# Altium PCB EE52_Digital_Oscilloscope.PcbDoc (part 2 of 5)
Units mil, origin at the board's own origin, x right, y up, seen from the top; angles counter-clockwise.
Board outline 7431 x 5662 mil, 2 copper layers (Top Layer, Bottom Layer); 305 components, 396 nets, 1532 pads, 389 vias.
Unrouted connection lines stored in the file: 2.
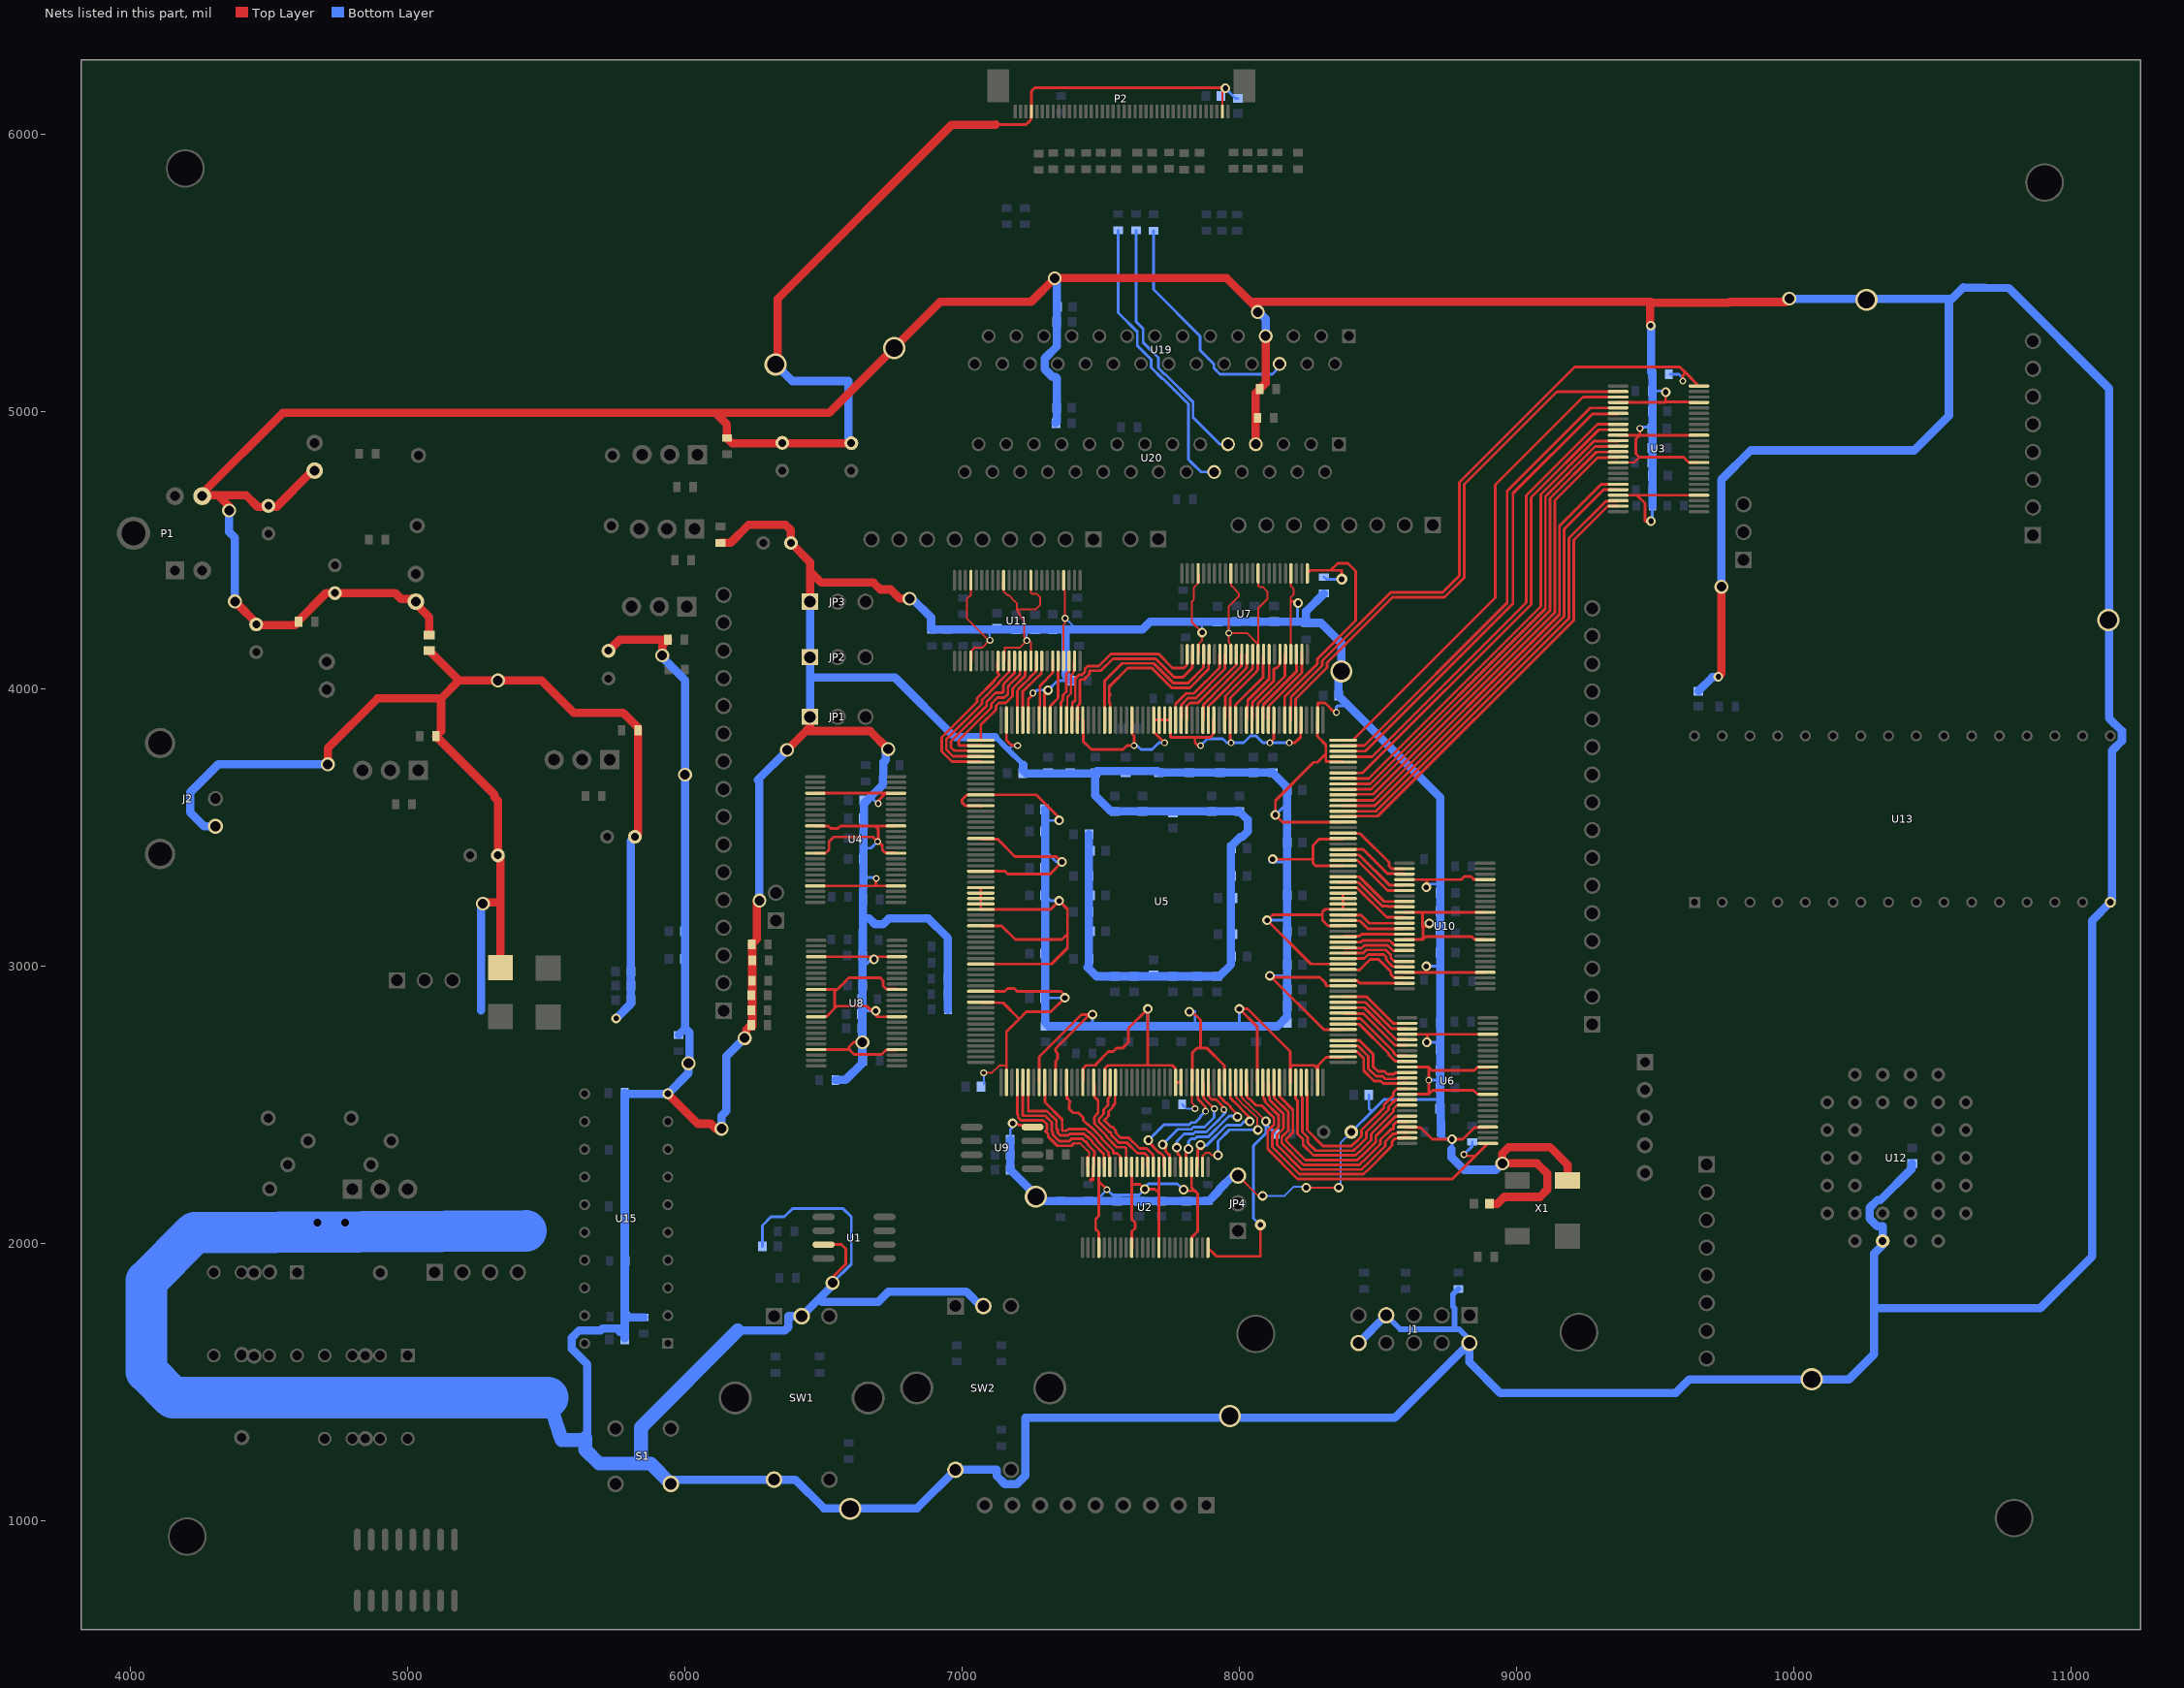
[diagram p2: the nets of this part, all layers, seen from the top]

## Via types
v1: diameter 35, hole 20, Top Layer to Bottom Layer, 188 vias
v2: diameter 25, hole 15, Top Layer to Bottom Layer, 82 vias
v3: diameter 60, hole 42, Top Layer to Bottom Layer, 48 vias
v4: diameter 50, hole 35, Top Layer to Bottom Layer, 46 vias
v5: diameter 80, hole 62, Top Layer to Bottom Layer, 14 vias
v6: diameter 40, hole 20, Top Layer to Bottom Layer, 10 vias
v7: diameter 45, hole 30, Top Layer to Bottom Layer, 1 vias

## Nets (pads, with @x,y where several pads share a name; then routed paths per layer and width w, separated by ;. In a path a pad name is that pad's centre, name@x,y a point inside that pad or via, vN(x,y) a via of type N, cw(c..) or ccw(c..) an arc to the next point about the centre after c; other vN are vias at no path point) (continued)
GND: C1.1 C2.1 C3.1 C4.1 C5.1 C6.1 C7.1 C8.1 C9.1 C10.1 C11.1 C12.1 C13.1 C14.1 C15.1 C16.1 C17.1 C18.1 C19.1 C20.1 C21.1 C22.1 C23.1 C24.1 C25.1 C26.1 C27.1 C28.1 C29.1 C30.1 C31.1 C32.1 C33.1 C34.1 C35.1 C36.1 C37.1 C38.1 C39.1 C40.1 C41.1 C42.1 C43.1 C44.1 C45.1 C46.1 C47.1 C48.1 C49.1 C50.1 C51.2 C52.1 C53.1 C54.1 C55.1 C56.1 C57.1 C58.1 C59.1 C60.1 C61.1 C62.1 C63.1 C64.1 C65.1 C66.1 C67.1 C68.1 C69.1 C70.1 C71.1 C72.1 C73.1 C74.2 C75.1 C76.1 C77.1 C78.1 C79.1 C80.1 C81.1 C82.1 C83.1 C84.1 C85.1 C86.1 C87.1 C88.1 C89.1 C90.1 C91.1 C92.1 C93.1 C96.1 C99.1 C101.2 C103.2 C104.2 C105.1 C106.1 C107.1 C108.1 C109.1 C110.1 C112.2@4497,4660 C113.2 C115.1 C118.1 C123.1 C124.1 C125.1 C126.1 C127.1 C128.1 D1.2 D3.2 J1.2 J1.7 J1.10 JP1.1 JP2.1 JP3.1 JP4.3 L1.2 P1.4 P2.1 P2.36 R7.2 R8.1 R10.1 R11.1 R14.2 R16.1 R17.1 R18.1 R19.1 R20.1 R21.1 R25.1 R27.1 R29.2 R31.1 R32.1 R33.1 R34.1 R35.1 R36.1 R37.1 R42.1 R43.1 R44.1 R56.1 R64.1 R67.1 R68.1 R97.1 R102.1 R109.1 R110.1 R111.2 R112.2 R113.2 R114.2 R117.2 R118.1 R119.2 R120.1 R121.2 R122.1 R123.2 R124.1 R125.2 R126.1 R127.2 R128.1 R129.2 R130.1 R131.1 R132.1 R133.1 S1.1 SW1.2 SW1.5 SW2.2 SW2.5 U1.3 U2.4 U2.10 U2.15 U2.21 U2.28 U2.34 U2.39 U2.45 U3.4 U3.10 U3.15 U3.21 U3.28 U3.34 U3.39 U3.45 U4.4 U4.10 U4.15 U4.21 U4.28 U4.34 U4.39 U4.45 U5.2 U5.8 U5.11 U5.16 U5.20 U5.33 U5.34 U5.36 U5.42 U5.48 U5.54 U5.59 U5.62 U5.67 U5.75 U5.79 U5.86 U5.89 U5.90 U5.91 U5.92 U5.97 U5.102 U5.105 U5.116 U5.122 U5.125 U5.130 U5.138 U5.141 U5.149 U5.150 U5.151 U5.152 U5.156 U5.165 U5.172 U5.175 U5.179 U5.191 U5.193 U5.199 U5.205 U5.208 U5.209 U5.210 U5.211 U5.212 U5.215 U5.222 U5.227 U5.229 U6.4 U6.10 U6.15 U6.21 U6.28 U6.34 U6.39 U6.45 U7.4 U7.10 U7.15 U7.21 U7.28 U7.34 U7.39 U7.45 U8.4 U8.10 U8.15 U8.21 U8.28 U8.34 U8.39 U8.45 U9.4 U10.4 U10.10 U10.15 U10.21 U10.28 U10.34 U10.39 U10.45 U11.4 U11.10 U11.15 U11.21 U11.28 U11.34 U11.39 U11.45 U12.16 U13.16 U15.10 U19.7 U20.7 X1.2 | length 82113.4
  Top Layer w7: U11.28@7031.3,4100.22 7034.58,4103.5 7034.58,4138.51 7044.19,4148.12 7071.96,4148.12 7097.42,4173.58 7018,4253 7018,4325.6 7031.3,4338.9 U11.21@7031.3,4391.56 ; v2(7077.56,2615) 7107.7,2615 7133.2,2640.5 7155.19,2640.5 7159.69,2645 ; U11.34@7149.41,4100.22 7152.69,4100.22 7152.69,4148.12 7207.12,4148.12 v2(7233,4174) ; U11.15@7149.41,4391.56 7146.13,4391.56 7146.13,4359.94 7149.41,4356.66 7149.41,4350.59 7154.01,4346.2 7163.21,4337.43 7168.3,4337.43 7190.07,4315.66 7197.79,4307.95 7197.79,4285.92 ; U11.39@7247.84,4100.22 7247.84,4168.16 7236,4180 v2@7234.5,4178.5 ; U11.10@7247.84,4391.56 7247.84,4346.76 7253.1,4341.5 7269.56,4341.5 7282,4329.06 7282,4302.94 7264.98,4285.92 7197.79,4285.92 ; U11.45@7365.95,4100.22 7365.95,4230 ; 7365.95,4231 7370.5,4235.55 7370.5,4351.99 7369.22,4353.27 7369.22,4388.28 U11.4@7365.95,4391.56 ; U5.36@7828.98,2580 7828.98,2506.02 v2@7840,2495 ; U7.28@7851.3,4124.66 7854.58,4127.94 7854.58,4162.95 7864.19,4172.56 7866,4172.56 v1(7866,4203) 7828.5,4240.5 7828.5,4314.56 7834.69,4320.75 7834.69,4363.69 7854.58,4383.58 7854.58,4412.72 U7.21@7851.3,4416 ; P2.1@7938.68,6081.5 v1@7938.68,6162.68 ; U7.34@7969.41,4124.66 7966.13,4127.94 7966.13,4162.95 7962,4167.08 v2(7962,4201) ; U7.15@7969.41,4416 7969.41,4372.69 7974.1,4368 7975.53,4368 7989,4354.53 7989,4353.6 7998,4344.6 7998,4333.4 7962,4297.4 v2(7962,4201) ; JP4.3@7995,2244 v1@8071,2168 ; U7.39@8065.31,4127.19 8064.56,4127.94 8064.56,4162.95 8026.51,4201 v2(7962,4201) ; U7.39@8066.06,4126.44 U7.39@8067.84,4124.66 8067.84,4289.84 8101,4323 8101,4330.08 8100.61,4330.47 8100.61,4349.53 8101,4349.92 8101,4350.6 8084.6,4367 8072.6,4367 8067.84,4371.76 U7.10@8067.84,4416 ; U7.45@8185.95,4124.66 8185.95,4330.42 8195,4339.47 8195,4360.53 8185.95,4369.58 U7.4@8185.95,4416 ; v1(8241,2200) 8353,2200 8354,2201 v1(8358,2201) ; U3.39@9366.66,4816.17 9423.66,4816.17 9442.5,4835 ; 7197.79,4285.92 7223,4242 7223,4190 v2@7234.5,4178.5 ; v2(7233,4174) 7236,4177 v2@7234.5,4178.5 ; v2(7233,4174) 7233,4177 v2@7234.5,4178.5
  Top Layer w10: U4.21@6470,3288.74 6689,3288.74 ; U4.15@6470,3406.85 6507.13,3406.85 6519.5,3419.22 6519.5,3448.22 6536.78,3465.5 6678.5,3465.5 v2(6695,3449) ; U4.10@6470,3505.28 6517,3505.28 6526.78,3495.5 6551.22,3495.5 6561,3505.28 6685,3505.28 ; U4.4@6470,3623.39 6734.77,3623.39 6732.99,3621.61 6722.43,3621.61 6697.39,3596.57 v2(6697.39,3586) ; U8.21@6473,2698.74 6592,2698.74 ; U8.15@6473,2816.85 6510.13,2816.85 6540,2846.72 ; U8.10@6473,2915.28 6542,2915.28 ; U8.4@6473,3033.39 6677,3033.39 6677,3023 6681,3019 6682,3020 v1(6682,3024) ; U1.3@6501,1996 6564,1996 6580,1980 6580,1925 6532,1877 v4(6532,1857) ; v4(6640,2725) 6608,2725 6592,2709 6592,2698.74 ; v1@6682,3033.39 U8.45@6764.34,3033.39 ; v1(6688,2838) 6694,2832 6694,2816.85 ; v2(6690,3316) 6689,3315 6689,3288.74 ; v2@6696,3450 v2@6697,3449 ; U4.28@6761.34,3288.74 6689,3288.74 ; U4.34@6761.34,3406.85 6759.56,3408.63 6722.43,3408.63 6711.94,3419.12 6711.94,3434.06 v2@6697,3449 ; U4.39@6761.34,3505.28 6685,3505.28 ; U8.28@6764.34,2698.74 6762.56,2696.96 6725.43,2696.96 6709.2,2680.74 6610,2680.74 6592,2698.74 ; U8.34@6764.34,2816.85 6694,2816.85 ; U8.39@6764.34,2915.28 6762.56,2917.05 6725.43,2917.05 6714.94,2927.54 6714.94,2947.23 6704.84,2957.33 6591.05,2957.33 6574.5,2940.78 6574.5,2940.25 6560.15,2925.9 6559.62,2925.9 6540,2906.28 6540,2846.72 ; U5.229@7067.17,2869.37 7068.94,2867.59 7147.41,2867.59 7205.63,2809.37 ; U5.227@7067.17,2908.74 7153.91,2908.74 7163.72,2918.56 7188.16,2918.56 7197.98,2908.74 7356.26,2908.74 7370,2895 v1(7370,2885) 7320,2835 7231.27,2835 7205.63,2809.37 ; U5.222@7067.17,3007.17 7322.17,3007.17 7380,3065 7380,3115 ; U5.215@7067.17,3144.96 7142.01,3144.96 7191.97,3095 7360,3095 7380,3115 ; U5.208@7067.17,3282.76 U5.209@7067.17,3263.07 U5.210@7067.17,3243.39 U5.211@7067.17,3223.7 U5.212@7067.17,3204.02 7319.02,3204.02 v1(7350,3235) 7380,3205 7380,3115 ; U5.205@7067.17,3341.81 7154.46,3341.81 7164.28,3332 7317,3332 v1(7360,3375) 7340,3395 7190.71,3395 7127.57,3458.14 7068.95,3458.14 U5.199@7067.17,3459.92 ; U5.193@7068.95,3576.25 U5.193@7067.17,3578.03 7011.33,3578.03 7000,3589.36 7000,3599.97 7017.44,3617.4 U5.191@7067.17,3617.4 7267.6,3617.4 7350,3535 v1(7350,3525) ; 7121,6035 7230.12,6035 7240.01,6044.89 7240.9,6044.89 7247.93,6051.92 7247.93,6068.25 7249.71,6070.02 P2.36@7249.71,6081.5 7249.71,6154.71 7262.5,6167.5 7948.5,6167.5 v1(7950,6166) ; U5.2@7159.69,2580 7159.69,2645 7159.69,2763.42 7205.63,2809.37 ; U5.179@7159.69,3887.09 7159.69,3814.31 7179,3795 v2(7200,3795) ; v1(7182,2432) 7198.66,2432 7204.66,2426 7215.96,2426 7217.3,2424.66 7240.06,2424.66 U9.4@7245.72,2419 ; 7191.27,2795 7205.63,2809.37 ; U5.175@7238.43,3887.09 7238.43,3963.43 v2@7260,3985 ; U5.8@7277.8,2580 7277.8,2672.8 7430,2825 v1@7460,2825 ; U5.172@7299.26,3885.31 U5.172@7297.48,3887.09 7297.48,3932.94 7297.5,3982.5 v1(7310,3995) ; U5.11@7336.85,2580 7336.85,2657.2 7344.5,2664.85 7344.5,2685.15 7336.85,2692.8 7336.85,2701.85 v1@7460,2825 ; U5.165@7434,3879.67 7435.28,3880.95 U5.165@7435.28,3887.09 7437.06,3885.31 7437.06,3809.72 7466.28,3780.5 7580.15,3780.5 7594.65,3795 v2(7620,3795) 7620,3829.8 7614.22,3835.57 7614.22,3885.31 U5.156@7612.44,3887.09 ; U5.16@7435.28,2580 7437.06,2581.78 7437.06,2631.51 7447.55,2642 7481.8,2642 7481.8,2645.59 7528.2,2692 7545.28,2692 7557.78,2704.5 7579.5,2704.5 7600,2725 7600,2775 v1(7670,2845) 7670,2642 ; v1(7470,2825) v1@7460,2825 ; U2.4@7493.06,1984 7493.06,2039.22 7481.5,2050.78 7481.5,2086.78 7493.06,2098.33 7493.06,2222.94 ; U2.45@7493.06,2275.34 7493.06,2222.94 ; U5.20@7514.02,2580 7514.92,2580 7514.92,2618.34 7515.8,2619.21 7515.8,2631.51 7526.29,2642 7670,2642 ; v2(7522,2193) 7522,2194 7493.06,2222.94 ; U2.10@7611.17,1984 7612.94,1985.78 7612.94,2022.91 7612.17,2023.69 7612.17,2042.52 7623.5,2053.85 7623.5,2074.15 7612.17,2085.48 7612.17,2213 7641,2213 v1(7659,2195) 7695.59,2195 7709.59,2181 ; 7611.17,2212 U2.39@7611.17,2275.34 ; U2.15@7709.59,1984 7709.59,2181 ; U2.34@7709.59,2275.34 7709.59,2181 ; v2(7730,3805) 7691.18,3843.82 U5.152@7691.18,3887.09 U5.151@7710.87,3887.09 U5.150@7730.55,3887.09 U5.149@7750.24,3887.09 7752.02,3887.09 7752.02,3825.79 7752.72,3825.09 7840,3825.09 ; U5.34@7789.61,2580 U5.33@7769.92,2580 7768.14,2580 7768.14,2631.51 7757.65,2642 7670,2642 ; v1(7799,2193) 7799,2192 7802,2189 7839,2189 ; v1(7820,2835) 7830,2835 7860,2805 7860,2704.5 ; U2.21@7827.7,1984 7827.7,2021.13 7849,2042.43 7849,2179.77 7839.77,2189 7839,2189 ; U2.28@7827.7,2275.34 7827.7,2200.3 7839,2189 ; U5.36@7828.98,2580 7830.5,2580 7830.5,2687.22 7847.78,2704.5 7860,2704.5 ; 7840,2188 7839,2189 ; v2(7860,3795) 7850,3795 7840,3805 7840,3825.09 ; U5.141@7905.94,3887.09 7905.94,3835.57 7895.45,3825.09 7840,3825.09 ; U5.42@7947.09,2580 7945.31,2580 7945.31,2641.3 7882.1,2704.5 7860,2704.5 ; v2(7970,3805) 7966.77,3808.23 U5.138@7966.77,3887.09 7966.77,3966.69 8060.69,4060.6 8060.69,4062.06 8066.06,4067.43 8066.06,4126.44 U7.39@8066.06,4127.94 ; U5.48@8065.2,2580 8065.2,2779.8 v1(8000,2845) 8030,2845 8183.31,2691.69 U5.54@8183.31,2580 8185.09,2580 8185.09,2641.3 8185.79,2642 8269.46,2642 8280.83,2630.64 8280.83,2580 U5.59@8281.73,2580 8283.51,2581.78 8283.51,2641.3 8312.96,2670.74 8372.47,2670.74 U5.62@8374.25,2672.52 ; v2(8110,3805) 8124.25,3819.25 U5.130@8124.25,3887.09 ; v1(8120,3385) 8265.5,3385 ; v2(8180,3805) 8200.11,3805 8220.9,3825.79 8220.9,3885.31 U5.125@8222.68,3887.09 ; 8191,4315 8208,4315 8212,4311 v1(8212,4309) ; v2(8350,3915) 8342.92,3915 8308.83,3949.09 8284.22,3949.09 8283.51,3948.38 8283.51,3888.86 U5.122@8281.73,3887.09 8281.73,3828.03 8312.25,3797.51 8312.25,3765 ; U5.67@8374.25,2770.95 8304.05,2770.95 v1(8110,2965) 8120,2965 8125.5,2959.5 8290.15,2959.5 8310.62,2939.03 8310.62,2932.55 8314.74,2928.43 U5.75@8374.25,2928.43 ; U5.79@8374.25,3007.17 8257.83,3007.17 v1(8100,3165) 8120,3185 8300,3185 ; U5.86@8374.25,3144.96 8320.04,3144.96 8300,3165 8300,3185 ; U5.92@8374.25,3263.07 U5.91@8374.25,3243.39 U5.90@8374.25,3223.7 U5.89@8374.25,3204.02 8373.27,3205 8310,3205 8300,3195 8300,3185 ; U5.97@8374.25,3361.5 8274.5,3361.5 8265.5,3370.5 8265.5,3385 ; U5.102@8374.25,3459.92 8372.47,3458.14 8288.49,3458.14 8265.5,3435.15 8265.5,3385 ; U5.105@8374.25,3518.98 8156.02,3518.98 v1(8130,3545) 8130,3596.72 8267.78,3734.5 8281.75,3734.5 8312.25,3765 ; U5.116@8374.25,3735.51 8372.47,3737.29 8312.95,3737.29 8312.25,3737.99 8312.25,3765 ; U10.45@8595.66,2977.06 8672,2977.06 ; U10.39@8595.66,3095.17 8663,3095.17 ; U10.34@8595.66,3193.59 8661,3193.59 ; U10.28@8595.66,3311.7 8677,3311.7 ; U6.45@8598.78,2417.33 8653.89,2417.33 8696.22,2375 v1(8767,2375) 8805.5,2375 8847.83,2417.33 8894.75,2417.33 U6.4@8896.53,2419.11 ; U6.39@8605.19,2537.22 8683,2537.22 ; U6.34@8605.19,2635.65 8682,2635.65 8683,2634.65 ; U6.28@8605.19,2753.76 8678,2753.76 ; 8661,3139 8661,3193.59 ; v1(8674,2999) 8673,2999 8672,3000 8672,2977.06 ; v1(8674,3284) 8677,3287 8677,3311.7 ; v1(8676,2725) 8678,2725 8678,2753.76 ; v1(8685,3154) 8673,3142 8663,3142 8663,3095.17 ; U10.4@8887,2977.06 8672,2977.06 ; U10.10@8887,3095.17 8848.83,3095.17 8838.5,3105.5 8673.33,3105.5 8663,3095.17 ; U10.15@8887,3193.59 8661,3193.59 ; U10.21@8887,3311.7 8847.02,3311.7 8836.22,3322.5 8811.78,3322.5 8800.98,3311.7 8677,3311.7 ; U6.10@8896.53,2537.22 8859.39,2537.22 8844.62,2552 8697.78,2552 8683,2537.22 ; U6.15@8896.53,2635.65 8894.75,2633.87 8857.62,2633.87 8847.75,2624 8693.65,2624 8683,2634.65 ; U6.21@8896.53,2753.76 8678,2753.76 ; U3.45@9366.66,4698.06 9434,4698.06 ; U3.34@9366.66,4914.59 9445,4914.59 ; U3.28@9366.66,5032.7 9538,5032.7 ; v2(9445,4939) 9445,4914.59 ; v1(9485,4605) 9463,4605 9463,4669.06 9434,4698.06 ; v1(9538,5070) 9538,5032.7 ; U3.4@9658,4698.06 9434,4698.06 ; U3.10@9658,4816.17 9620.87,4816.17 9608.6,4828.43 9608.6,4829.4 9603,4835 9442.5,4835 9430,4847.5 9430,4899.59 9445,4914.59 ; U3.15@9658,4914.59 9445,4914.59 ; U3.21@9658,5032.7 9619.02,5032.7 9617.22,5034.5 9539.8,5034.5 9538,5032.7 ; 6540,2846.72 6548.28,2855 6655.85,2855 6694,2816.85 ; 6685,3505.28 6697,3493.28 v2@6697,3449 ; 8683,2537.22 v2(8683,2588) 8683,2634.65
  Top Layer w30: P1.4@4250.42,4696.72 P1.4@4252.42,4698.72 ; v4(4355,4643) 4355,4658.72 4315,4698.72 ; v4(4376,4315) 4462,4229 4592.47,4229 R113.2@4605.47,4242 4605.47,4245.55 4704.92,4345 C113.2@4737,4345 4955,4345 4976,4324 5011,4324 5077,4258 L1.2@5077,4193.95 ; D3.2@4650,4780 4526,4656 4458,4656 4415.28,4698.72 4315,4698.72 ; C104.2@5724,4137 5764,4177 R68.1@5938.47,4177 5918,4156.53 v4(5918,4120) ; U15.10@5938,2539 6046,2431 6093,2431 6111,2413 v4(6132,2413) ; R10.1@6128,4526.47 6164.47,4526.47 6229,4591 6363,4591 6382,4572 C103.2@6382,4526 6451,4457 6451,4424 ; v4@6220,2730 6220,2768.53 R130.1@6238.47,2787 R130.1@6242.47,2783 ; R120.1@6240.47,3078 6258.53,3096.06 6258.53,3236 v4(6268.53,3236) ; R120.1@6242.47,3078 R122.1@6242.47,3020 R130.1@6242.47,2783 ; R130.1@6243,2782.47 R130.1@6242.47,2783 ; v5@6335,5195 6335,5407 6962,6034 7120,6034 7121,6035 ; v4(6368,3779) 6440,3851 ; JP1.1@6451,3899 6451,3862 6440,3851 ; JP3.1@6451,4314 6451,4424 ; C51.2@6600,4886 6169.53,4886 R67.1@6151,4904.53 6151,4954 6110,4995 ; v4(6733,3782) 6667.53,3847.47 6443.53,3847.47 6440,3851 ; v4(6810,4325) 6775.06,4325 6742.06,4358 6704.67,4358 6679.67,4383 6492,4383 6451,4424 ; v4(7334,5481) 7248.67,5395.67 6920.67,5395.67 6520,4995 6110,4995 ; v4@7356,5481 7954.67,5481 8040,5395.67 ; U20.7@8059,4882 8059,5066.53 R111.2@8073.47,5081 8095,5102.53 U19.7@8095,5272 ; v4(8066,5359) 8069,5362 8069,5366.67 8040,5395.67 ; C14.1@8901.56,2142 8930.56,2142 8955.56,2167 9084,2167 9111,2194 9111,2251 9074,2288 v4(8949,2288) 8949,2324 8972,2347 9120.53,2347 9184,2283.53 X1.2@9184,2226.79 ; v1(9484,5310) 9482,5312 9482,5392.67 9767.21,5392.67 9769.53,5395 9972,5395 v4(9984,5407) ; 9485,5395.67 8040,5395.67 ; v1(9728,4043) 9739,4054 v4(9739,4368) ; P1.4@4252.42,4698.72 4548.71,4995 6110,4995 ; P1.4@4252.42,4698.72 4315,4698.72
  Bottom Layer w7: C67.1@7077.56,2575 v2(7077.56,2615) ; 7081,4214 7100,4195 v2(7100,4175) ; 7232,4214 7233,4213 v2(7233,4174) ; v2(7371,4254) 7373,4254 R42.1@7412.47,4214.53 ; R25.1@7793.53,2501 7809.53,2485 v2(7840,2485) ; v1(7866,4203) 7866,4242 ; v2(7962,4201) 7962,4241 ; v1(8084,2171) 8163,2171 8196,2204 8239,2204 8241,2202 v1(8241,2200) ; v1(8358,2201) 8365,2194 8365,2362 C74.2@8404,2401
  Bottom Layer w10: C1.1@6279.44,1989 6279.44,2064.44 6310,2095 6358.28,2095 6387.78,2124.5 6570.5,2124.5 6600,2095 6600,1925 v4(6532,1857) ; C19.1@6636.56,2826 6639.47,2828.91 6648.56,2838 v1(6688,2838) ; v4@6639.47,2725 v4(6640,2725) ; 6640.52,2993.99 6664.53,3018 6688,3018 v1(6682,3024) ; 6643.17,3319.02 6686.98,3319.02 v2(6690,3316) ; 6644.04,3425.05 6671.05,3425.05 v2(6695,3449) ; 6678.22,3618.74 6678.22,3601.78 6697,3583 6698,3584 6697.39,3584.61 v2(6697.39,3586) ; 7161.72,3785 7170,3785 7180,3795 v2(7200,3795) ; C29.1@7173.56,2374 7173.56,2410.56 v1@7195,2432 ; v1(7182,2432) v1@7195,2432 ; v1@7196,2433 v1@7195,2432 ; v2@7257.5,3982.5 7270,3995 v1(7310,3995) 7344,4029 R27.1@7393.47,4029 ; C59.1@7300,2885 v1(7370,2885) ; C45.1@7300,3255 7320,3235 v1(7350,3235) ; 7300,3415 7340,3375 v1(7360,3375) ; 7300,3525 v1(7350,3525) ; 7470,2782.56 v1(7470,2825) ; 7495,2152.47 7495,2165 v2@7523,2193 ; v2(7522,2193) v2@7523,2193 ; v2(7620,3795) 7630,3795 7644.5,3780.5 7685.5,3780.5 7710,3805 v2(7730,3805) ; 7660,2782.56 7670,2792.56 v1(7670,2845) ; v1(7799,2193) 7797,2193 7776,2214 7672,2214 7659,2201 v1(7659,2195) 7637.5,2173.5 7542.5,2173.5 v2@7523,2193 ; v1(7820,2835) 7840,2835 7840,2792.56 7830,2782.56 ; v2(7860,3795) 7884.5,3819.5 7940.15,3819.5 7954.65,3805 v2(7970,3805) 8015.35,3805 8039.85,3829.5 8060.15,3829.5 8084.65,3805 v2(8110,3805) v2(8180,3805) ; v1(7950,6166) 7986.44,6129.56 C108.1@7995,6129.56 ; 8000,2782.56 v1(8000,2845) ; v1(8100,3165) 8172.44,3165 ; v1(8110,2965) 8172.44,2965 ; v1(8120,3385) 8110,3375 8162.44,3375 8172.44,3365 ; v1(8130,3545) 8160,3575 8172.44,3575 ; 8207,4242 8210,4245 8210,4307 v1(8212,4309) ; v2(8350,3915) 8350,3935 8353.78,3938.78 8386.22,3938.78 8390,3942.56 ; C74.2@8404,2401 8478,2475 ; C64.1@8467.56,2535 8467.56,2485.44 8478,2475 ; v1(8674,2999) 8718.53,2999 8724.53,3005 ; v1(8674,3284) 8686,3296 8724.53,3296 ; v1(8676,2725) 8718.53,2725 8724.53,2731 ; v2(8683,2588) 8715.53,2588 ; v1(8685,3154) 8724.53,3154 ; R32.1@8724,2398 8728.09,2393.91 8747,2375 v1(8767,2375) 8767,2342 ; 8724.53,2519 8522,2519 8478,2475 ; v2(9445,4939) 9445,4943 9446,4944 9482.44,4944 C4.1@9487.44,4939 ; v1(9485,4605) 9490,4600 9490,4659.47 R18.1@9490.53,4660 ; R20.1@9487.53,5074 9490.53,5074 9534,5074 v1(9538,5070)
  Bottom Layer w20: 7120,3825 7121.72,3825 7161.72,3785 7220,3726.72 7220,3725 ; J1.7@8530,1740 8580,1690 8770,1690 ; R11.1@8790,1835.47 8770,1815.47 8770,1772.33 8776.53,1765.8 8776.53,1696.53 8770,1690 ; J1.2@8830,1640 8830,1653 8793,1690 8770,1690
  Bottom Layer w30: v4(4355,4643) 4355,4566 4376,4545 v4(4376,4315) ; 5640,1297 5647,1304 5647,1563.53 5591,1619.53 5591,1658.47 5618.53,1686 5695.86,1686 5702.58,1692.72 5765.19,1692.72 5765.19,1679.66 5782.53,1697 ; C96.1@5782.53,1657.03 5782.53,1697 ; R31.1@5788.53,1735 5791,1732.53 R110.1@5851,1732.53 ; v4(5918,4120) 5918,4113 6001,4030 6001,2775.53 ; S1.1@5949,1132 5964,1147 SW1.5@6321,1147 6398,1147 6501,1044 6837,1044 SW2.5@6976,1183 7124,1183 7124,1161.46 7154.46,1131 7197.54,1131 7228,1161.46 7228,1370 8560,1370 J1.2@8830,1640 8830,1571 8941,1460 9574,1460 9623,1509 v5(10065,1509) 10199,1509 10289.5,1599.5 10289.5,1765.5 ; R114.2@5977,2751.53 6001,2775.53 ; v4(6132,2413) 6132,2460 6149,2477 6149,2674 v4(6215,2740) ; 6190,1685 6360.11,1685 6373,1697.89 6373,1737 SW1.2@6421,1737 6483.5,1799.5 ; v4(6268.53,3236) 6268.53,3664.47 6262,3671 6368,3777 v4(6368,3779) ; v5(6327,5170) 6387,5110 6590,5110 6590,4896 C51.2@6600,4886 ; JP1.1@6451,3899 6451,4041 ; JP3.1@6451,4314 JP2.1@6451,4114 6451,4041 ; v4(6532,1857) 6526,1851 6526,1842 6483.5,1799.5 ; R29.2@6542.53,2589 6579.47,2589 6639.47,2649 6639.47,2725 6639.47,2828.91 R129.2@6639.47,2865 ; R129.2@6639.47,2865.03 6639.6,2880.97 6640,2930.01 6640.42,2981 6640.43,2982.01 6640.52,2993.99 6640.88,3038 6641.23,3080.99 6641.34,3093.99 6641.97,3170.95 ; R16.1@6714.98,3724 6714.41,3654.34 6678.22,3618.74 6675.91,3616.46 6670.85,3611.48 6650.75,3591.71 6647.72,3588.73 6645.36,3586.45 6644.91,3531.99 6644.9,3530.06 6644.33,3460.99 6644.32,3460.07 6644.04,3425.05 6643.72,3386 6643.71,3385.07 6643.17,3319.02 6642.53,3240.01 6642.51,3237.14 6641.97,3170.95 ; R16.1@6715.47,3724 6715.47,3734.47 6724,3743 6724,3773 v4(6733,3782) ; v4(6810,4325) 6820,4325 6887.69,4257.31 6887.69,4216.83 R35.1@6890.53,4214 ; R35.1@6891,4213.53 R35.1@6890.53,4214 ; R127.2@6947.53,2842 R125.2@6947.53,2898 R123.2@6947.53,2954 R119.2@6947.53,3069 ; R119.2@6948.53,3070 6948.53,3100.47 6878.05,3170.95 6734.74,3170.95 6714.29,3150.5 6685.71,3150.5 6665.26,3170.95 6641.97,3170.95 ; SW2.2@7071.56,1768.56 7015.11,1825 6734,1825 6698,1789 6494,1789 6483.5,1799.5 ; 7081,4214 R35.1@6890.53,4214 ; 7084,4214 7232,4214 7373,4214 ; 7120,3825 6973.71,3825 6757.71,4041 6451,4041 ; C29.1@7173.56,2374 C28.1@7173.56,2319 C27.1@7173.56,2265 7286.03,2152.53 R14.2@7355,2152.53 ; 7220,3725 7220,3705 7230,3695 7480,3695 7480,3615 7537.56,3557.44 C79.1@7550,3557.44 C76.1@7650,3557.44 C80.1@7900,3557.44 C82.1@8000,3557.44 8030,3527.44 8030,3485 8009.72,3464.72 8002.7,3464.72 7970,3432.02 7970,3325 7970,3005 7927.56,2962.56 C88.1@7920,2962.56 C89.1@7760,2962.56 C87.1@7620,2962.56 C81.1@7550,2962.56 7485.12,2962.56 7452.67,2995 7457.56,3005 C85.1@7457.56,3025 C84.1@7457.56,3195 C78.1@7457.56,3325 C77.1@7457.56,3475 ; C118.1@7297.56,3565 7300,3562.56 7300,3525 7300,3415 7300,3255 7300,2885 7300,2795 7312.44,2782.56 C41.1@7360,2782.56 7470,2782.56 C46.1@7500,2782.56 7660,2782.56 7830,2782.56 C47.1@7910,2782.56 8000,2782.56 C62.1@8060,2782.56 8137.56,2782.56 8172.44,2817.44 C48.1@8172.44,2855 C63.1@8172.44,2915 8172.44,2965 C60.1@8172.44,3125 8172.44,3165 C43.1@8172.44,3255 8172.44,3365 8172.44,3575 C55.1@8172.44,3635 8172.44,3645 C57.1@8120,3697.44 C52.1@7930,3697.44 C42.1@7820,3697.44 C44.1@7710,3697.44 7704.94,3702.5 7485.06,3702.5 C39.1@7480,3697.44 ; C109.1@7336.44,4958 7341.44,4963 7341.44,5119.56 7336,5125 7325.53,5125 7298,5152.53 7298,5191.47 7342,5235.47 v4@7342,5481 ; R14.2@7355.47,2152.47 R17.1@7454,2152.47 7495,2152.47 R21.1@7886,2152.47 7889.55,2152.47 7925.72,2188.64 7925.72,2192.19 JP4.3@7977.53,2244 ; R27.1@7393.47,4029 7373,4049.47 7373,4214 ; 7866,4242 7678,4242 7651,4215 7651.47,4214.53 R42.1@7422,4214.53 7412.47,4214.53 7373.53,4214.53 7373,4214 ; 7876,4242 8207,4242 8239,4242 R33.1@8241,4240 ; v4(8066,5359) 8069.82,5359 8095,5333.82 U19.7@8095,5272 ; R97.1@8305,4343.47 8241,4279.47 R33.1@8241,4240 ; J1.10@8425,1633 J1.10@8431,1639 ; J1.10@8430,1640 J1.7@8530,1740 ; R32.1@8728.09,2392.41 8728.09,2393.91 8728.09,2402.05 8725.56,2485.09 8724.53,2519 8724.53,2700 8724.53,2731 8724.53,3005 8724.53,3154 8724.53,3263 8724.53,3296 R133.1@8724.53,3385 8724.53,3608.03 8390,3942.56 C66.1@8357.56,3975 8357.56,4052.56 v5(8368,4063) 8368,4163.86 8294.33,4237.53 R33.1@8241,4237.53 R33.1@8241,4240 ; 8765,2340 8765,2310 8810,2265 8926,2265 v4(8949,2288) ; v1(9484,5310) 9484,5306 9485.47,5304.53 9485.47,5140 9490.53,5134.94 9490.53,5074 9490.53,5002 9490.53,4769 R18.1@9490.53,4660 ; C92.1@9656,3991.56 9706.44,4042 9729,4042 v1(9728,4043) ; v4(9739,4368) 9739,4754 9845,4860 10435,4860 10560,4985 10560,5395.85 10571.15,5407 ; v4(9984,5407) 10571.15,5407 ; C93.1@10426,2287.94 10426,2269.44 10311.56,2155 10301.53,2155 10274,2127.47 10274,2088.53 10301.53,2061 10321,2061 U12.16@10321,2008 10321,1993.86 10289.5,1962.36 10289.5,1765.5 ; 5782.53,1697 5782.53,1936 R56.1@5782.53,2542 5785.53,2539 U15.10@5938,2539 6012.57,2613.57 v4(6012.57,2649) 6016.72,2653.15 6016.72,2759.81 6001,2775.53 ; 10289.5,1765.5 10889.5,1765.5 11077,1953 11077,3165 U13.16@11142,3230 11148,3236 11148,3776.6 11184,3812.6 11184,3847.4 11138,3893.4 11138,5083 10775.53,5445.47 10611.7,5447.55 10571.15,5407
  Bottom Layer w50: 5505,1442.5 5548.5,1309.84 5555,1290 5633,1290 ; 5640,1297 5640,1255 5690,1205 5876,1205 S1.1@5949,1132 ; 5841,1216 5841,1336 6190,1685
  Bottom Layer w150: 5426.5,2045 4231,2038 4057,1864 4057,1538 4152.5,1442.5 5505,1442.5
  other v2: 7255,3985
  other v4: 6000,3690
  other v5: 6596,1042 7966,1377 7266,2168 11135,4248 6755,5229 10262,5403
GNDA: C98.1 C102.2 C119.2 C121.1 C122.1 D7.1 J2.2 L1.1 R104.1 R115.1 | length 4837.3
  Top Layer w10: v1@5746.64,2816.36 v1(5752,2811)
  Top Layer w30: v4(4711.5,3727.5) 4711.5,3786 4890.45,3964.95 5120,3964.95 ; L1.1@5077,4138.05 5185.05,4030 ; v4(5271,3225) 5281,3225 5285,3229 5334,3229 ; D7.1@5334,2994.58 5334,3229 ; C102.2@5819,3466 5830.53,3477.53 R115.1@5830.53,3850 5830.53,3859.47 5777,3913 5599,3913 5482,4030 v4(5325,4030) 5185.05,4030 ; 5120,3964.95 5120,3847.47 R104.1@5101.53,3829 5313,3617.53 5313,3608 5325,3596 C119.2@5325,3399 5334,3390 5334,3229 ; 5120,3964.95 5185.05,4030
  Bottom Layer w30: J2.2@4306,3504 4265,3504 4215,3554 4215,3626 4316.5,3727.5 v4(4711.5,3727.5) ; 5263.5,2839.64 5263.5,3217.5 v4(5271,3225) ; v1(5752,2811) 5804.56,2863.56 C121.1@5804.56,2877 C122.1@5804.56,2977 ; C122.1@5804.56,2980 5804.56,3451.56 C102.2@5819,3466
GNDA\: 
GREEN0: R82.2 U19.6 | length 836.7
  Bottom Layer w10: R82.2@7690,5652.47 7690,5440 7858,5272 7858,5221 7908,5171 7908,5156.67 7929.67,5135 8119,5135 U19.6@8139,5155 ; U19.6@8142.67,5172 U19.6@8145,5172
GREEN1: R83.1 U20.9 | length 927
  Bottom Layer w10: R83.1@7628,5653.47 7628,5324 7653,5299 7653,5249 7708,5194 7708,5156.67 7729.67,5135 7732.04,5135 7833,5034.04 7833,4979 7930,4882 U20.9@7959,4882
GREEN2: R84.2 U20.10 | length 1044.3
  Bottom Layer w10: R84.2@7563,5653.47 7563,5356.33 7632,5287.33 7632,5238 7682,5188 7682,5158.63 7722.63,5118 7725,5118 7816,5027 7816,4827 7824,4819 7824.33,4819 7861.33,4782 U20.10@7909,4782
IO4: U2.47 U5.4 | length 526.8
  Top Layer w7: 7425.5,2360.5 7435.5,2350.5 ; 7435.5,2348.49 7437.62,2348.49 7458.15,2327.96 7458.15,2316.94 U2.47@7451.91,2310.69
  Top Layer w10: U5.4@7199.06,2580 7199.06,2464.64 7201.74,2461.96 7201.74,2453.98 7211.5,2444.22 7211.5,2443.2 7211.7,2443 7291.94,2443 7306,2428.94 7306,2409.06 7300.91,2403.97 7310,2394.88 7310,2384.5 7343,2351.5 7393.78,2351.5 7402.78,2360.5 7425.5,2360.5 ; U2.47@7451.91,2310.69 7451.91,2277.12 U2.47@7453.69,2275.34
IO5: U2.46 U5.5 | length 594.7
  Top Layer w10: U5.5@7218.74,2580 7218.74,2461.02 7219.76,2460 7298.98,2460 7323,2435.98 7323,2405.92 7327,2401.92 7327,2391.54 7350.04,2368.5 7386.74,2368.5 7395.74,2377.5 7432.54,2377.5 7442.54,2367.5 7444.53,2367.5 7452.5,2359.53 7452.5,2355.53 7476.5,2331.53 7476.5,2315.6 7475.15,2314.25 7475.15,2280.68 U2.46@7471.59,2277.12 ; U2.46@7473.37,2275.34 U2.46@7471.59,2277.12 ; 7471.59,2236.43 U2.46@7471.59,2277.12 ; 7471.59,2236.43 7471.59,2227.3 7462.46,2227.3 7471.59,2236.43
IO6: U2.44 U5.6 | length 520.2
  Top Layer w10: U5.6@7238.43,2580 7238.43,2477 7306.02,2477 7340,2443.02 7340,2412.96 7341.96,2411 7344,2411 7344,2398.58 7353.96,2388.62 7382.82,2388.62 7388.7,2394.5 7426.26,2394.5 7426.76,2395 7439.08,2395 7449.58,2384.5 7451.57,2384.5 7469.5,2366.57 7469.5,2362.57 7510.96,2321.11 7510.96,2275.34 U2.44@7512.74,2275.34
IO9: U2.43 U5.9 | length 459.9
  Top Layer w10: U5.9@7297.48,2580 7299.26,2578.22 7299.26,2507.81 7361,2446.07 7361,2405.62 7375.78,2405.62 7382.16,2412 7394.28,2412 7394.78,2411.5 7419.22,2411.5 7419.72,2412 7446.12,2412 7456.62,2401.5 7458.61,2401.5 7486.5,2373.61 7486.5,2369.61 7527.96,2328.15 7527.96,2316.93 7530.65,2314.25 U2.43@7530.65,2277.12
IO13: U2.41 U5.13 | length 410.6
  Top Layer w10: U5.13@7374.44,2578.22 7378,2574.66 7378,2522.96 7390,2510.96 7390,2509.65 7385.5,2505.15 7385.5,2484.85 7399.85,2470.5 7419.22,2470.5 7436.5,2453.22 7436.5,2443.66 7451.16,2429 7453.17,2429 7463.67,2418.5 7465.66,2418.5 7503.5,2380.66 7503.5,2376.66 7544.96,2335.19 7544.96,2324.74 7559.53,2324.74 7570.02,2314.25 7570.02,2277.12 U2.41@7571.8,2275.34
IO18: U2.40 U5.18 | length 380
  Top Layer w10: U5.18@7472.87,2578.22 7476.43,2574.66 7476.43,2528.49 7490,2514.92 7490,2469.08 7476.57,2455.65 7476.57,2431.63 7520.5,2387.7 7520.5,2383.7 7557.7,2346.5 7586.42,2346.5 7591.48,2341.44 U2.40@7591.48,2275.34
IO19: U2.38
IO20: U2.37
IO21: U2.36 U5.21 | length 427.3
  Top Layer w10: U5.21@7531.92,2580 7531.92,2528.49 7526.01,2522.58 7526.01,2497.77 7510.5,2482.26 7510.5,2465.54 7493.57,2448.61 7493.57,2438.67 7531.81,2400.43 7534.7,2400.43 7537.5,2397.63 7537.5,2390.74 7564.74,2363.5 7593.46,2363.5 7632.22,2324.74 7657.95,2324.74 7668.44,2314.25 7668.44,2277.12 U2.36@7670.22,2275.34
IO22: U2.35 U5.22 | length 427.3
  Top Layer w10: U5.22@7551.61,2578.22 7551.61,2503.41 7543.01,2494.81 7543.01,2490.73 7527.5,2475.22 7527.5,2458.5 7512.64,2443.64 7536.78,2419.5 7541.78,2419.5 7554.5,2406.78 7554.5,2397.78 7571.78,2380.5 7600.5,2380.5 7639.26,2341.74 7664.99,2341.74 7688.13,2318.61 7688.13,2277.12 U2.35@7689.91,2275.34
IO37: U2.33 U5.37 | length 488.5
  Top Layer w10: v1(7672,2372) 7672,2365.28 7710.78,2326.5 7715.25,2326.5 7727.5,2314.25 7727.5,2277.12 U2.33@7729.28,2275.34 ; U5.37@7850.44,2578.22 7850.44,2519.78 7878,2492.22 v2(7878,2476)
  Bottom Layer w10: v1(7672,2372) 7728,2428 7819.16,2428 7826.66,2435.5 7840.5,2435.5 7859.11,2454.11 7859.11,2457.11 v2(7878,2476) v2@7878,2477
IO38: U2.32 U5.38 | length 456.9
  Top Layer w10: v1@7734,2356 7734,2331.79 7748.96,2316.83 U2.32@7748.96,2275.34 ; U5.38@7870,2580 7870,2533.33 7870.13,2533.2 7870.13,2525.65 7872.81,2522.96 7872.81,2521.45 7909.26,2485 v2(7910,2485)
  Bottom Layer w10: v1(7723,2356) 7778,2411 7826.2,2411 7833.7,2418.5 7873.5,2418.5 7909,2454 7909,2484 v2(7910,2485)
IO39: U2.30 U5.39 | length 499.5
  Top Layer w10: v1(7774,2345) v1@7777,2345 ; v1@7779,2357 v1@7777,2355 ; U2.30@7788.33,2275.34 7786.55,2277.12 7786.55,2314.25 7777,2323.8 v1@7777,2345 ; U5.39@7889.81,2578.22 7889.81,2528.49 7900.3,2518 7915.63,2518 7944,2489.63 v2(7944,2482) ; v1@7777,2345 v1@7777,2350.31 ; v1@7777,2345 7782.31,2345 v1@7777,2350.31 ; v1@7777,2350.31 v1@7777,2355 ; v1@7777,2350.31 7774.66,2352.66 v1@7777,2355
  Bottom Layer w10: v1(7774,2345) 7784,2345 7785,2346 7774,2357 7774,2367 7801,2394 7833.24,2394 7840.74,2401.5 7880.54,2401.5 7907.04,2428 7908.21,2428 7926,2445.79 7926,2446.96 7949.25,2470.21 v2@7949.25,2476 ; v2@7943.25,2482 v2(7944,2482)
IO41: U2.29 U5.41 | length 474.6
  Top Layer w10: U2.29@7808.02,2275.34 7807,2276.35 7807,2331 v1(7816,2340) ; U5.41@7927.4,2580 7927.4,2530.27 7939.67,2518 ; 7941.5,2516.17 7951.17,2506.5 7954.15,2506.5 7968.5,2492.15 7968.5,2489.17 v1@7997.34,2460.34 ; v1@7988.25,2456 v1(7993,2456)
  Bottom Layer w10: v1@7807,2343 7810,2340 v1(7816,2340) 7816,2367 7826,2377 7840.28,2377 7847.78,2384.5 7888.75,2384.5 7950.79,2446.53 7962.82,2458.56 7990.44,2458.56 v1(7993,2456)
IO43: U2.27 U5.43 | length 470.5
  Top Layer w10: U2.27@7847.39,2275.34 7849.16,2277.12 7849.16,2337.16 7851.13,2339.13 v1@7863,2339.13 ; U5.43@7967.5,2579.27 7967.5,2524.26 8005.22,2486.54 8005.22,2485.5 8044.13,2446.59 v1@8044.13,2446.13 ; v1@8031.25,2439 v1(8037,2439)
  Bottom Layer w10: v1(7860,2355) 7865.79,2355 v1@7869,2351.79 ; v1@7863.21,2346 v1@7869,2351.79 ; v1(8037,2439) 8017.72,2439 8004.72,2426 7954.3,2426 7880.08,2351.79 v1@7869,2351.79
IO44: U2.26 U5.44 | length 535.2
  Top Layer w7: U2.26@7867.07,2275.34 7867.07,2314.57 7878,2325.5 ; 7878,2326 7892.91,2326 7901.84,2317.07 v1(7923.07,2317.07) ; U5.44@7986.46,2580 7986.46,2533.42 7987.89,2533.42 7989.74,2531.57 7989.74,2523.94 8020.72,2492.96 8021.41,2492.96 8025.88,2488.5 8027.1,2488.5 8065,2450.6 8065,2427.4 8057,2419.4 v1@8057,2409
  Top Layer w10: v1(8067,2409) v1@8067,2420
  Bottom Layer w10: v1(7923.07,2317.07) 7923.07,2368.07 7964,2409 v1(8067,2409)
IO45: R4.1 U2.24 U5.45 | length 982.9
  Top Layer w7: U5.45@8009.42,2576.72 8009.42,2524.75 8012.11,2522.07 8012.11,2521.37 8026.52,2506.96 8027.21,2506.96 8031.68,2502.5 8032.9,2502.5 8083,2452.4 8083,2439.08 8096,2426.08 8097,2427.08 8095.64,2428.44 v1(8095.64,2439.75)
  Top Layer w10: U2.24@7886.76,1984 7917.76,1953 8076,1953 v6(8076,2067)
  Bottom Layer w10: v6@8074,2067 8051,2090 8051,2351.28 8096.5,2396.78 8096.5,2421.22 8087.7,2430.02 v1@8095.64,2437.96 ; v1(8095.64,2439.75) v1@8095.64,2437.96 ; v1@8097,2439.32 v1@8095.64,2437.96 ; R4.1@8128.47,2397 8095.64,2429.83 v1@8095.64,2437.96
IO46: R9.1 U5.46 U6.1 | length 1294.7
  Top Layer w10: U5.46@8027.61,2578.22 8027.61,2527.79 8032.94,2522.46 8033.63,2522.46 8038.1,2518 8039.32,2518 8060.82,2496.5 8080.62,2496.5 8125.14,2451.97 8125.14,2427.53 8102,2404.39 8102,2339.92 8209.92,2232 8768.47,2232 8851.47,2315 ; v2(8810,2320) 8817.94,2320 8822.94,2315 8851.47,2315 ; U6.1@8896.53,2360.06 8851.47,2315
  Bottom Layer w10: v2(8810,2320) 8840,2350 R9.1@8840,2365.47
IO49: U5.49 U6.47 | length 868.4
  Top Layer w10: U5.49@8086.66,2578.22 8086.66,2524.3 8089.35,2521.62 8089.35,2519.1 8091.69,2519.1 8092.03,2518.76 8092.03,2510.05 8142.14,2459.94 8142.14,2420.49 8119,2397.35 8119,2346.96 8216.96,2249 8447,2249 8460,2262 8461.58,2262 8543,2343.42 8543,2345 8550.64,2352.64 ; 8551,2352 8551,2367 8561.96,2377.96 8589.79,2377.96 8589.79,2381.52 U6.47@8615,2381.52
IO50: U5.50 U6.46 | length 826.7
  Top Layer w10: U5.50@8106.35,2578.22 8106.35,2528.49 8109.03,2525.8 8109.03,2517.09 8159.14,2466.98 8159.14,2413.45 8136,2390.31 8136,2354 8224,2266 8439.96,2266 8452.96,2279 8454.53,2279 8526,2350.47 8526,2366.04 8554.92,2394.96 8563.59,2394.96 8566.28,2397.65 8572.79,2397.65 8572.79,2399.43 U6.46@8605.19,2399.43
IO51: U5.51 U6.44 | length 814.8
  Top Layer w10: U5.51@8126.03,2578.22 8126.03,2524.13 8176.14,2474.02 8176.14,2406.41 8153,2383.27 8153,2361.05 8231.05,2283 8432.92,2283 8445.92,2296 8447.49,2296 8509,2357.51 8509,2373.08 8547.88,2411.96 8555.79,2411.96 8555.79,2426.53 8566.28,2437.02 8589.79,2437.02 8589.79,2438 8604.39,2438 U6.44@8605.19,2438.8
IO52: U5.52 U6.43 | length 774.3
  Top Layer w10: U5.52@8145.72,2570.1 8145.72,2528.49 8193.14,2481.06 8193.14,2399.37 8170,2376.23 8170,2368.09 8238.09,2300 8425.88,2300 8438.88,2313 8440.45,2313 8492,2364.55 8492,2386.78 8561.92,2456.7 8605.19,2456.7 U6.43@8605.19,2458.48
IO55: U5.55 U6.41 | length 723
  Top Layer w10: U5.55@8202.99,2580 8202.99,2521.44 8210.14,2514.29 8210.14,2394.45 8230,2374.59 8230,2355 8268,2317 8418.83,2317 8431.83,2330 8433.41,2330 8475,2371.59 8475,2393.82 8555.79,2474.61 8555.79,2485.58 8569.84,2499.63 8603.41,2499.63 U6.41@8605.19,2497.85
IO56: U5.56 U6.40 | length 662.5
  Top Layer w10: U5.56@8224.46,2549.89 8224.46,2528.49 8227.14,2525.8 8227.14,2401.49 8247,2381.63 8247,2362.04 8275.04,2334 8411.79,2334 8424.79,2347 8426.37,2347 8458,2378.63 8458,2400.86 8538.79,2481.65 8538.79,2492.62 8563.7,2517.54 U6.40@8605.19,2517.54
IO57: U5.57 U6.38 | length 654.7
  Top Layer w10: U5.57@8242,2566 8242,2550.57 8242.52,2550.57 8244.14,2548.94 8244.14,2408.53 8301.67,2351 8404.75,2351 8417.75,2364 8419.33,2364 8441,2385.67 8441,2407.91 8521.79,2488.7 8521.79,2499.67 8555.79,2533.67 8555.79,2544.64 8568.06,2556.91 U6.38@8605.19,2556.91
IO63: U5.63 U6.37 | length 257.4
  Top Layer w10: U5.63@8423.98,2692.2 8448.5,2667.69 8448.5,2622.7 8485.7,2585.5 8509.5,2585.5 8519,2576 8589.27,2576 8591.64,2578.37 8603.41,2578.37 U6.37@8605.19,2576.59
IO64: U5.64 U6.36 | length 307.9
  Top Layer w10: U5.64@8374.25,2711.89 8428.34,2711.89 8465.5,2674.73 8465.5,2629.74 8492.74,2602.5 8516.54,2602.5 8526.04,2593 8564.78,2593 8566.28,2594.5 8583.73,2594.5 8584.6,2595.37 8604.28,2595.37 U6.36@8605.19,2596.28
IO65: U5.65 U6.35 | length 310.1
  Top Layer w10: U5.65@8374.25,2731.57 8432.7,2731.57 8482.5,2681.77 8482.5,2636.78 8499.78,2619.5 8523.58,2619.5 8533.08,2610 8557.74,2610 8561.92,2614.18 8603.41,2614.18 U6.35@8605.19,2615.96
IO68: U5.68 U6.33 | length 289.3
  Top Layer w10: U5.68@8374.25,2790.63 8432.41,2790.63 8538.79,2684.25 8538.79,2680.24 8561.92,2657.11 8603.41,2657.11 U6.33@8605.19,2655.33
IO69: U5.69 U6.32 | length 289.3
  Top Layer w10: U5.69@8374.25,2810.32 8436.77,2810.32 8555.79,2691.29 8555.79,2687.29 8566.28,2676.8 8603.41,2676.8 U6.32@8605.19,2675.02
IO70: U5.70 U6.30 | length 276.3
  Top Layer w10: U5.70@8376.03,2828.22 8447.78,2828.22 8561.61,2714.39 U6.30@8605.19,2714.39
IO71: U5.71 U6.29 | length 278.8
  Top Layer w10: U5.71@8374.25,2849.69 8450.36,2849.69 8564.19,2735.85 8603.41,2735.85 U6.29@8605.19,2734.07
IO72: U5.72 U6.27 | length 270.7
  Top Layer w10: U5.72@8374.25,2869.37 8454.71,2869.37 8549.74,2774.35 8604.28,2774.35 U6.27@8605.19,2773.44
IO73: U5.73 U6.26 | length 272.5
  Top Layer w10: U5.73@8374.25,2889.06 8459.07,2889.06 8555,2793.13 U6.26@8605.19,2793.13 U6.26@8605.19,2791.35
IO76: U5.76 U10.47 | length 173.5
  Top Layer w10: 8425.76,2946.33 8434.41,2937.69 U10.47@8595.66,2937.69
IO78: U5.78 U10.46 | length 219.4
  Top Layer w10: 8426.46,2985 8433,2985 8472,3024 8502.87,3024 8546.26,2980.61 8546.26,2969.64 8556.75,2959.15 8593.88,2959.15 U10.46@8595.66,2957.37
IO80: U5.80 U10.44 | length 252
  Top Layer w10: U5.80@8374.25,3026.85 8450.81,3026.85 8464.96,3041 8520.89,3041 8529.26,3032.62 8529.26,3021.65 8552.39,2998.52 8593.88,2998.52 U10.44@8595.66,2996.74
IO81: U5.81 U10.43 | length 249.8
  Top Layer w10: U5.81@8374.25,3046.54 8446.45,3046.54 8457.92,3058 8527.93,3058 8546.26,3039.67 8546.26,3028.69 8558.53,3016.43 U10.43@8595.66,3016.43
IO82: U5.82 U10.41 | length 232
  Top Layer w10: U5.82@8376.03,3064.44 8440.32,3064.44 8450.88,3075 8534.97,3075 8554.17,3055.8 U10.41@8595.66,3055.8
IO83: U5.83 U10.40 | length 232.4
  Top Layer w10: U5.83@8374.25,3085.91 8437.74,3085.91 8443.83,3092 8542.01,3092 8556.75,3077.26 8592.76,3077.26 8595.66,3074.36 U10.40@8595.66,3075.48
IO84: U5.84 U10.38 | length 222.7
  Top Layer w10: U5.84@8376.03,3107.37 8433.24,3107.37 8440.72,3114.85 U10.38@8595.66,3114.85
IO87: U5.87 U10.37 | length 231.4
  Top Layer w10: U5.87@8376.03,3162.87 8435.55,3162.87 8463.88,3134.54 U10.37@8595.66,3134.54
IO88: U5.88 U10.36 | length 231.4
  Top Layer w10: U5.88@8376.03,3182.55 8439.91,3182.55 8468.24,3154.22 U10.36@8595.66,3154.22
IO93: U5.93 U10.35 | length 216.8
  Top Layer w10: U5.93@8423.98,3282.76 8531.06,3175.68 8593.88,3175.68 U10.35@8595.66,3173.91
IO94: U5.94 U10.33 | length 273
  Top Layer w10: U5.94@8359,3301 8429.78,3301 8514.82,3215.96 8534.04,3215.96 8534.95,3215.05 8593.88,3215.05 U10.33@8595.66,3213.28
IO95: U5.95 U10.32 | length 258.3
  Top Layer w10: U5.95@8374.25,3322.13 8432.7,3322.13 8521.86,3232.96 U10.32@8595.66,3232.96
IO98: U5.98 U10.30 | length 216.1
  Top Layer w10: 8425,3382 8534.67,3272.33 U10.30@8595.66,3272.33
IO99: U5.99 U10.29 | length 266.5
  Top Layer w10: U5.99@8374.25,3400.87 8432.13,3400.87 8540.98,3292.02 U10.29@8595.66,3292.02
IO100: U5.100 U10.27 | length 258.3
  Top Layer w10: U5.100@8374.25,3420.55 8446.45,3420.55 8533.84,3333.16 8593.88,3333.16 U10.27@8595.66,3331.39
IO103: U5.103 U10.26 | length 280.1
  Top Layer w10: U5.103@8376.03,3477.83 8435.55,3477.83 8539.97,3373.4 8539.97,3359.84 8548.74,3351.07 U10.26@8595.66,3351.07
IO106: U3.47 U5.106 | length 1623.1
  Top Layer w10: U5.106@8376.03,3540.44 8499.4,3540.44 9206,4247.04 9206,4536 9328.69,4658.69 U3.47@9366.66,4658.69
IO107: U3.46 U5.107 | length 1625.8
  Top Layer w10: U5.107@8374.25,3558 8492.92,3558 9189,4254.08 9189,4543.04 9322.55,4676.59 9364.88,4676.59 U3.46@9366.66,4678.37
IO108: U3.44 U5.108 | length 1648.9
  Top Layer w10: U5.108@8374.25,3578.03 8488.91,3578.03 9172,4261.12 9172,4576 9313.74,4717.74 U3.44@9366.66,4717.74
IO109: U3.43 U5.109 | length 1651.3
  Top Layer w10: U5.109@8374.25,3597.72 8484.55,3597.72 9155,4268.17 9155,4587 9305.43,4737.43 U3.43@9366.66,4737.43
IO110: U3.38 U5.110 | length 1732.6
  Top Layer w10: U5.110@8376.03,3619.18 8481.97,3619.18 9138,4275.21 9138,4679.72 9292.35,4834.07 9366.66,4834.07 U3.38@9366.66,4835.85
IO111: U3.37 U5.111 | length 1734.1
  Top Layer w10: U5.111@8374.25,3637.09 8475.84,3637.09 9121,4282.25 9121,4686.76 9287.99,4853.76 9364.88,4853.76 U3.37@9366.66,4855.54
IO112: U3.36 U5.112 | length 1734.1
  Top Layer w10: U5.112@8374.25,3656.77 8471.48,3656.77 9104,4289.29 9104,4693.8 9283.64,4873.44 9364.88,4873.44 U3.36@9366.66,4875.22
IO113: U3.35 U5.113 | length 1733.3
  Top Layer w10: U5.113@8374.25,3676.46 8467.12,3676.46 9087,4296.33 9087,4700.84 9279.28,4893.13 U3.35@9366.66,4893.13
IO114: U3.33 U5.114 | length 1731.3
  Top Layer w10: U5.114@8374.25,3696.14 8444.14,3696.14 9052,4304 9052,4689.89 9296.39,4934.28 U3.33@9366.66,4934.28
IO117: U3.32 U5.117 | length 1715
  Top Layer w10: U5.117@8374.25,3755.2 8479.16,3755.2 9034.98,4311.02 9034.98,4696.91 9292.03,4953.96 U3.32@9366.66,4953.96
IO118: U3.30 U5.118 | length 1731.3
  Top Layer w10: U5.118@8374.25,3774.88 8454.88,3774.88 8987,4307 8987,4705 9273.55,4991.55 9366.66,4991.55 U3.30@9366.66,4993.33
IO119: U3.29 U5.119 | length 1733.2
  Top Layer w10: U5.119@8374.25,3794.57 8450.53,3794.57 8966,4310.04 8966,4713 9266.02,5013.02 U3.29@9366.66,5013.02
IO120: U3.27 U5.120 | length 1709.3
  Top Layer w10: U5.120@8409.25,3814.25 8923,4328 8923,4736 9239.39,5052.39 U3.27@9366.66,5052.39
IO126: U3.26 U5.126 | length 1906.9
  Top Layer w10: U5.126@8202.99,3887.09 8202.99,3963.12 8316,4076.13 8316,4094 8552,4330 8740,4330 8811,4401 8811,4738 9145.07,5072.07 U3.26@9366.66,5072.07
IO127: R118.2 U3.24 U5.127 | length 2381.8
  Top Layer w10: U5.127@8185.09,3887.09 8185.09,3942.95 8185.99,3943.86 8185.99,3970.16 8299,4083.17 8299,4101.04 8544.96,4347 8732.96,4347 8794,4408.04 8794,4745.04 9209.96,5161 9588.76,5161 9609.38,5140.38 ; v2(9600,5110) 9600,5131 9609.38,5140.38 ; U3.24@9658,5091.76 9609.38,5140.38
  Bottom Layer w10: R118.2@9554.53,5135 9586,5135 9600,5121 v2(9600,5110)
IO128: R97.2 U5.128 U7.1 | length 986.4
  Top Layer w10: U5.128@8163.62,3887.09 8163.62,3971.83 8282,4090.21 8282,4108.08 8420,4246.08 8420,4425 8392,4453 8355,4453 8329,4427 ; U7.1@8245,4416 8256,4427 8329,4427 ; v6(8369,4395) 8369,4427 8329,4427
  Bottom Layer w10: R97.2@8305,4402.53 8306.47,4404 8315.47,4395 v6(8369,4395)
IO131: U5.131 U7.47 | length 285.6
  Top Layer w10: U5.131@8106.35,3888.86 8106.35,3938.6 8226,4058.25 8226,4123.98 U7.47@8225.32,4124.66
IO132: U5.132 U7.46 | length 285.1
  Top Layer w10: U5.132@8086.66,3888.87 8086.66,3942.95 8205.63,4061.92 U7.46@8205.63,4124.66
IO133: U5.133 U7.44 | length 261.6
  Top Layer w10: U5.133@8065.2,3902.41 8066.98,3904.19 8066.98,3947.31 8164.48,4044.82 U7.44@8164.48,4122.88
IO134: U5.134 U7.43 | length 282.2
  Top Layer w10: U5.134@8047.29,3888.87 8047.29,3951.67 8124.21,4028.58 8124.21,4070.22 8129.24,4075.26 8134.31,4075.26 8144.8,4085.75 8144.8,4100.06 8147.48,4100.06 8147.48,4123.76 U7.43@8146.58,4124.66
IO135: U5.135 U7.41 | length 268.8
  Top Layer w10: U5.135@8027.61,3888.86 8027.61,3938.6 8030.29,3941.28 8030.29,3958.71 8107.21,4035.62 U7.41@8107.21,4124.66
IO137: U5.137 U7.40 | length 276.9
  Top Layer w10: U5.137@7986.46,3887.09 7986.46,3941.46 8085.74,4040.74 U7.40@8085.74,4122.88
IO139: U5.139 U7.38 | length 276.9
  Top Layer w10: U5.139@7948.87,3888.86 7948.87,3972.82 8043.69,4067.64 8043.69,4069.1 8048.15,4073.57 U7.38@8048.15,4124.66
IO142: U5.142 U7.37 | length 296.2
  Top Layer w10: U5.142@7888.03,3887.09 7888.03,3936.82 7900.3,3949.09 7901.09,3949.09 8026.69,4074.69 8026.69,4122.88 U7.37@8028.47,4124.66
IO143: U5.143 U7.36 | length 293.2
  Top Layer w10: U5.143@7870.13,3888.86 7870.13,3942.95 7952.46,4025.28 7952.46,4026.85 8007,4081.39 8007,4122.88 U7.36@8008.78,4124.66
IO146: U5.146 U7.35 | length 326.6
  Top Layer w10: U5.146@7811.07,3888.87 7811.07,3938.6 7821.56,3949.09 7850.65,3949.09 7989.1,4087.53 U7.35@7989.1,4124.66
IO147: U5.147 U7.33 | length 318.1
  Top Layer w10: U5.147@7791.39,3888.86 7791.39,3942.95 7814.52,3966.09 7843.13,3966.09 7947.95,4070.9 7947.95,4122.88 U7.33@7949.73,4124.66
IO148: U5.148 U7.32 | length 320.7
  Top Layer w10: U5.148@7769.92,3887.09 7769.92,3945.53 7807.48,3983.09 7836.09,3983.09 7928.26,4075.26 7928.26,4122.88 U7.32@7930.04,4124.66
IO160: U5.160 U7.30 | length 622.6
  Top Layer w10: U5.160@7533.7,3887.09 7533.7,3946.58 7530.5,3949.78 7530.5,3974.22 7533.7,3977.42 7533.7,3979.58 7530.5,3982.78 7530.5,4007.22 7597.78,4074.5 7684.42,4074.5 7755.92,4003 7821,4003 7888.89,4070.89 7888.89,4122.89 U7.30@7890.67,4124.66
IO161: U5.161 U7.29 | length 627.9
  Top Layer w10: U5.161@7515.8,3887.09 U5.161@7514.02,3887.09 7513.5,3887.6 7513.5,4028.5 7576.5,4091.5 7691.46,4091.5 7762.96,4020 7813.96,4020 7870.99,4077.03 U7.29@7870.99,4124.66
IO166: U5.166 U7.27 | length 683.4
  Top Layer w10: U5.166@7415.59,3887.09 7417.37,3887.09 7417.37,3938.6 7425,3946.23 7425,4030 7428.82,4033.82 7439.46,4033.82 7459.91,4054.27 7459.91,4064.91 7460.08,4065.08 7499.7,4065.08 7543.12,4108.5 7698.5,4108.5 7766.05,4040.95 7794.82,4040.95 7829.84,4075.96 7829.84,4122.88 U7.27@7831.62,4124.66
IO167: U5.167 U7.26 | length 664.1
  Top Layer w10: U5.167@7395.91,3887.09 7397.69,3888.87 7397.69,3948.38 7408,3958.7 7408,4037.04 7421.78,4050.82 7432.42,4050.82 7442.91,4061.31 7442.91,4071.95 7453.04,4082.08 7492.66,4082.08 7536.08,4125.5 7708.5,4125.5 7758.74,4075.26 7799.66,4075.26 7810.15,4085.75 U7.26@7810.15,4124.66
IO168: U5.168 U11.47 | length 225.2
  Top Layer w8: U5.168@7376.22,3887.09 7379,3889.86 7379,3951.98 7379.26,3952.24 7379.26,3970.26 7392,3983 7392,4046.83 7399.85,4054.68 7399.85,4059.04 7402.54,4061.72 7402.54,4097.44 U11.47@7405.32,4100.22
IO169: U5.169 U11.46 | length 225.2
  Top Layer w10: U5.169@7356.54,3887.09 7357,3887.55 7357,3952.61 7363.26,3958.87 7363.26,3976.89 7376,3989.63 7376,4053.46 7383.85,4061.31 7383.85,4098.44 U11.46@7385.63,4100.22
IO171: U5.171 U11.44 | length 221.1
  Top Layer w10: U5.171@7317,3891.25 7318.95,3893.2 7318.95,3938.6 7346.26,3965.91 U11.44@7346.26,4100.22
IO173: U5.173 U11.43 | length 229.4
  Top Layer w10: U5.173@7277.8,3887.09 U5.173@7277.8,3936.82 ; 7280.5,3940 7280.5,4010.54 7327,4057.04 7327,4099.8 U11.43@7326.58,4100.22
IO176: U5.176 U11.41 | length 243
  Top Layer w10: U5.176@7218.74,3887.09 7218.74,3990.27 7275.52,4047.04 7278,4047.04 7285.43,4054.47 7285.43,4098.44 U11.41@7287.21,4100.22
IO177: U5.177 U11.40 | length 242.7
  Top Layer w10: U5.177@7199.06,3887.09 7199.06,3992.14 7201.74,3994.83 7201.74,3997.31 7246.5,4042.07 7246.5,4044.12 7253.2,4050.82 7255.25,4050.82 7265.74,4061.31 7265.74,4065.67 7267.52,4067.45 U11.40@7267.52,4100.22
IO181: U5.181 U11.38 | length 367.4
  Top Layer w10: U5.181@7067.17,3814.25 7067.17,3869.7 7122.09,3924.63 7122.09,3938.6 7132.58,3949.09 7147.42,3949.09 7147.77,3948.73 7148.13,3949.09 7157.29,3949.09 7182.06,3973.85 7182.06,3999.18 7184.74,4001.87 7184.74,4004.35 7226.37,4045.98 7226.37,4098.44 U11.38@7228.15,4100.22
IO182: U5.182 U11.37 | length 489.4
  Top Layer w10: U5.182@7067.17,3794.57 6990.43,3794.57 6987.72,3797.28 6987.72,3814.29 7105.09,3931.67 7105.09,3945.64 7127.61,3968.16 7152.32,3968.16 7165.06,3980.89 7165.06,4006.22 7167.74,4008.91 7167.74,4011.39 7208.47,4052.12 U11.37@7208.47,4100.22
IO183: U5.183 U11.36 | length 535.1
  Top Layer w10: U5.183@7067.17,3774.88 7067.17,3776.66 6971.3,3776.66 6960,3787.96 6960,3810.61 7088.09,3938.71 7088.09,3952.68 7120.57,3985.16 7145.28,3985.16 7148.06,3987.93 7148.06,4013.26 7150.74,4015.95 7150.74,4018.43 7188.78,4056.47 U11.36@7188.78,4100.22
IO184: U5.184 U11.35 | length 548.8
  Top Layer w10: U5.184@7067.17,3755.2 7067.17,3756.98 6966.94,3756.98 6943,3780.92 6943,3817.66 7071.09,3945.75 7071.09,3959.72 7131.06,4019.68 7131.06,4020.31 7133.74,4022.99 7133.74,4025.48 7169.1,4060.83 U11.35@7169.1,4100.22
IO185: U5.185 U11.33 | length 571.3
  Top Layer w10: U5.185@7067.17,3735.51 7067.17,3737.29 6962.58,3737.29 6926,3773.88 6926,3824.7 7054.09,3952.79 7054.09,3966.76 7114.06,4026.73 7114.06,4027.35 7116.74,4030.03 7116.74,4032.52 7134.02,4049.8 7134.02,4050.81 7127.95,4056.89 U11.33@7127.95,4098.44